# Altium PCB APSS_PCB_Project.PcbDoc
Units mm, origin at the board's own origin, x right, y up, seen from the top; angles counter-clockwise.
Board outline 72.03 x 37.43 mm, 2 copper layers (Top Layer, Bottom Layer); 30 components, 19 nets, 110 pads, 11 vias.
Unrouted connection lines stored in the file: 1.
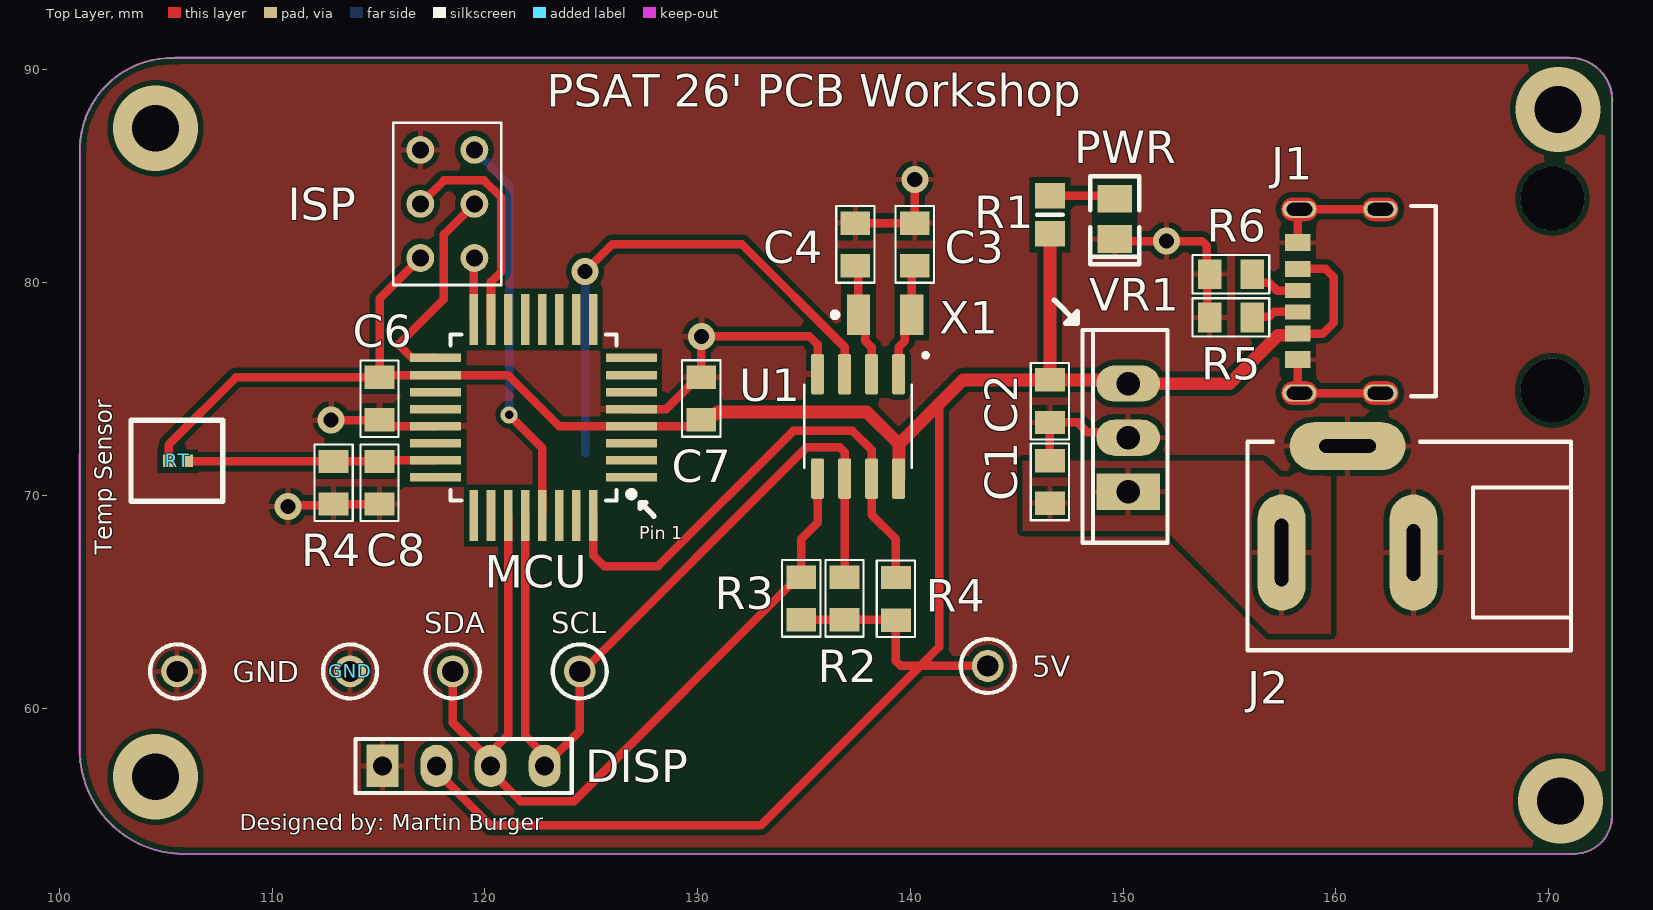
[diagram p0: Top Layer view]
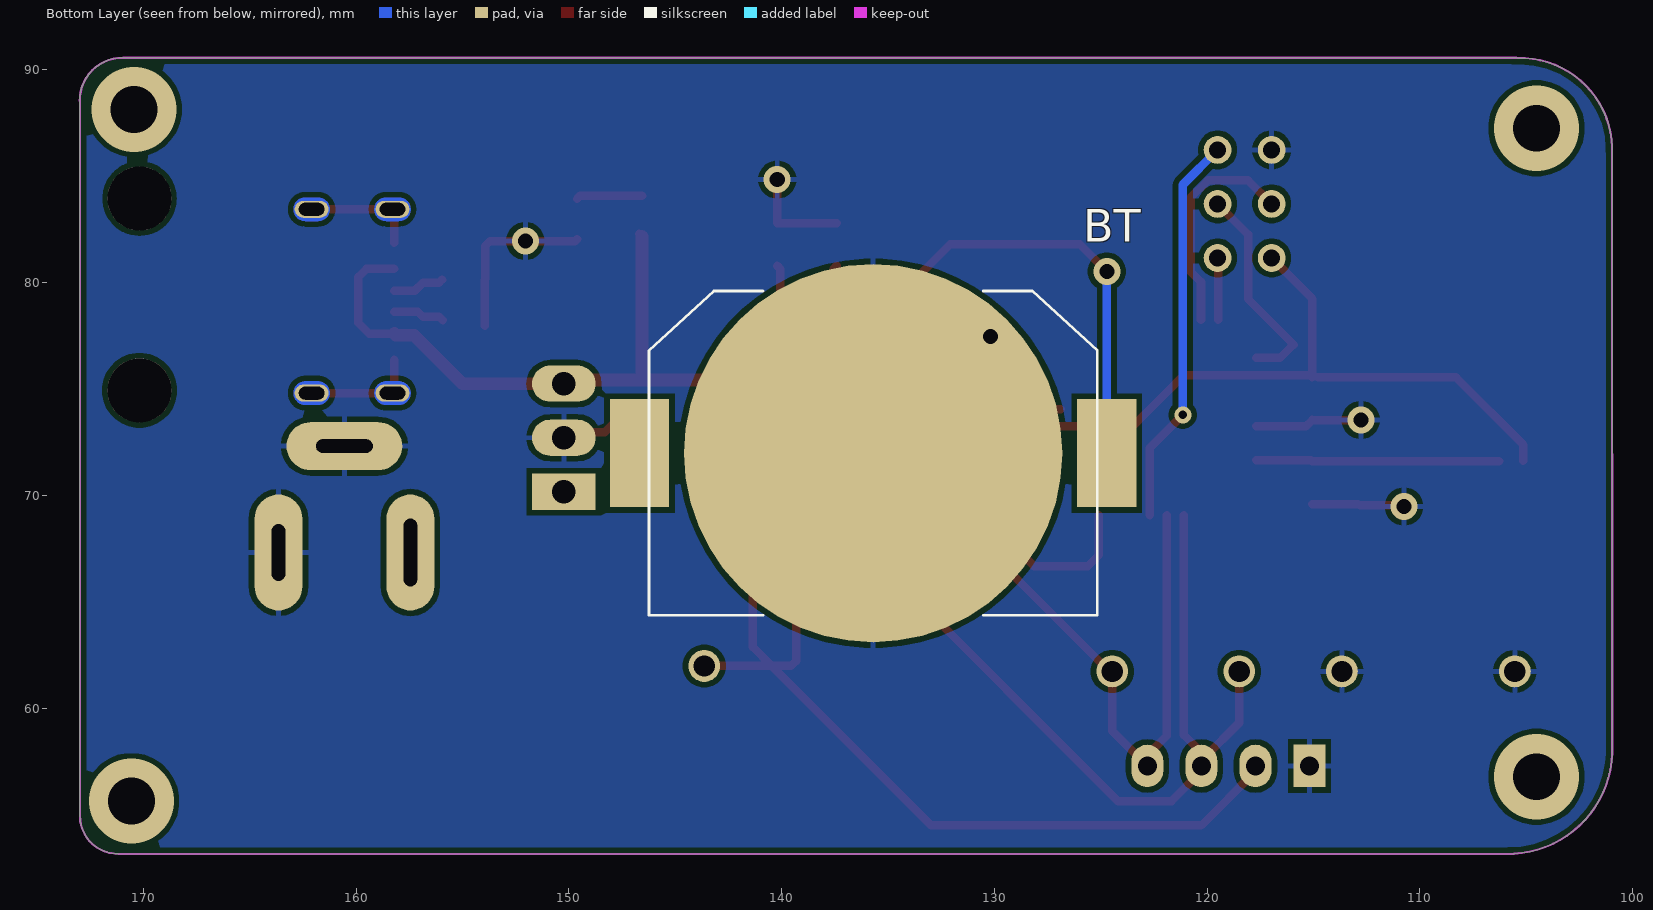
[diagram p1: Bottom Layer view, seen from below]

## Layer stack, top to bottom
Top Solder: solder mask 0.0102, Solder Resist, Dk 3.5
Top Layer: signal copper 0.0356
Dielectric 1: dielectric 0.32, FR-4, Dk 4.8
Bottom Layer: signal copper 0.0356
Bottom Solder: solder mask 0.0102, Solder Resist, Dk 3.5

## Board outline
100.965,86.105 100.965,86.107 cw(c105.29,86.233) 100.965,86.36 cw(c105.283,86.233) 105.41,90.551 105.452,90.562 170.955,90.562 170.951,90.562 cw(c170.989,88.563) 172.988,88.526 172.981,88.519 172.98,54.937 cw(c171.201,54.926) 171.17,53.147 105.624,53.136 105.579,53.152 cw(c105.851,58.038) 100.961,57.85

## Design rules (kind name [scope] priority, off if disabled: settings)
Clearance [All] p1: gap=0.254 ignorepadtopadclearanceinfootprint=FALSE
PolygonConnect [All] p1: connectstyle=Relief reliefconductorwidth=0.254 reliefentries=4 polygonreliefangle="90 Angle" airgapwidth=0.254
RoutingVias [All] p1: holewidth=0.711 width=1.27 viastyle="Through Hole" minholewidth=0.711 minwidth=1.27 maxholewidth=0.711 maxwidth=1.27
SolderMaskExpansion [All] p1: expansion=0.102 istentingtop=FALSE
Width [All] p1: maxlimit=1.2 minlimit=0.3 preferedwidth=0.4 minimp=50.000000 maximp=50.000000 favimp=50.000000
30 further rules are at their usual default settings.

## Classes and differential pairs
component class "555 Timer": 5V C1 C2 C6 C7 C8 DISP GND J1 MCU R1 R2 R3 R4 RT SCL SDA

## Components (designator, comment, footprint, x,y, rotation, side; value= is the part's Value field where it differs from the comment)
5V "5003" TP_TH 143.637,61.976 r0 top
BT "BK-912" BAT_BK-912 135.699,71.977 r180 bottom
C1 "330nF" "0805 CAP" 146.558,70.628 r90 top
C2 "100nF" "0805 CAP" 146.558,74.422 r270 top
C3 "*" "0805 CAP" 140.208,81.788 r90 top
C4 "*" "0805 CAP" 137.414,81.788 r90 top
C6 "100nF" "0805 CAP" 115.05,74.542 r270 top
C7 "100nF" "0805 CAP" 130.175,74.549 r90 top
C8 "100nF" "0805 CAP" 115.05,70.589 r270 top
DISP "Header 4" ece-HDR1X4 115.189,57.277 r0 top
GND "5003" TP_TH 105.537,61.722 r270 top
GND "5003" TP_TH 113.665,61.722 r270 top
J1 "USB4125-GF-A_REVA2" GCT_USB4125-GF-A_REVA2 161.29,79.121 r90 top
J2 "DC barrel jack" AC-Socket 163.449,67.31 r180 top value=socket (schematic designator J?)
MCU "ATmega328PB MCU" "32 - TQFP" 122.289,73.653 r180 top
PWR "*" ECE-LED2012-0805SM 149.606,82.992 r270 top (schematic designator LED1)
R1 "1k" RESC2012-0805SM 146.558,83.185 r90 top
R2 "*" "0805 RES" 136.906,65.151 r90 top
R3 "*" "0805 RES" 134.874,65.151 r90 top
R4 "*" "0805 RES" 139.319,65.135 r90 top
R4 "10k" "0805 RES" 112.891,70.589 r90 top
R5 "5.1k" "0805 RES" 155.067,78.359 r0 top
R6 "5.1k" "0805 RES" 155.067,80.391 r0 top
RT "NCP15XH103F03RC" THRMC1005X55N 105.576,71.621 r0 top
SCL "5003" TP_TH 124.46,61.722 r0 top
SDA "5003" TP_TH 118.491,61.722 r0 top
U1 "MCP7940N-I/SN" SOIC127P600X175-8N 137.541,73.237 r270 top
VR1 "" ece-TO220 152.087,68.766 r90 top
X1 "ABS07-32.768KHz-T" ABRA-ABS07-2_V 138.811,78.486 r0 top
? "AVR-ISP" AVR-ISP 118.237,83.693 r90 top

## Footprints (in the part's own frame and the unit in brackets; to place one, negate y for a bottom-side part, rotate by r counter-clockwise, add the part's x,y. Pads: shape width x height; smd on the part's side, far side on the other; paste and mask are expansions set on the pad)
"32 - TQFP" [mm]
  rect 2.4x0.4 smd: 1(-4.6,2.8) 2(-4.6,2) 3(-4.6,1.2) 4(-4.6,0.4) 5(-4.6,-0.4) 6(-4.6,-1.2) 7(-4.6,-2) 8(-4.6,-2.8) 17(4.6,-2.8) 18(4.6,-2) 19(4.6,-1.2) 20(4.6,-0.4) 21(4.6,0.4) 22(4.6,1.2) 23(4.6,2) 24(4.6,2.8)
  rect 0.4x2.4 smd: 9(-2.8,-4.6) 10(-2,-4.6) 11(-1.2,-4.6) 12(-0.4,-4.6) 13(0.4,-4.6) 14(1.2,-4.6) 15(2,-4.6) 16(2.8,-4.6) 25(2.8,4.6) 26(2,4.6) 27(1.2,4.6) 28(0.4,4.6) 29(-0.4,4.6) 30(-1.2,4.6) 31(-2,4.6) 32(-2.8,4.6)
  silkscreen extent -4.74,-3.9 3.9,3.9, body extent -4.5,-4.5 4.5,4.5, height 1.3
"0805 CAP" [mm] "http://www.digikey.co.nz/Web%20Export/Supplier%20Content/Vishay_8026/PDF/VishayBeyschlag_SolderPad.pdf?redirected=1 with dimension G modified by +0.25mm"
  rect 1.1x1.4 smd: 1(-1,0) 2(1,0)
  silkscreen extent -1.8,-0.9 1.8,0.9, body extent -1.04,-0.66 1.04,0.66, height 0.61
"0805 RES" [mm] "http://www.digikey.co.nz/Web%20Export/Supplier%20Content/Vishay_8026/PDF/VishayBeyschlag_SolderPad.pdf?redirected=1 with dimension G modified by +0.25mm"
  rect 1.1x1.4 smd: 1(-1,0) 2(1,0)
  silkscreen extent -1.8,-0.9 1.8,0.9, body extent -1.04,-0.66 1.04,0.66, height 0.61
ABRA-ABS07-2_V [mm] "SMD, 2-Leads, Body 3.2x1.5mm"
  rect 1.1x1.9 smd: 1(-1.25,0) 2(1.25,0)
  silkscreen extent -2.47,-0.12 -2.22,0.12, body extent -1.6,-0.75 1.6,0.75, height 0.9
AC-Socket [mm]
  oval 2.25x5.45 hole 0.635 slot 3.175 at 90 deg: 1(6,0)
  oval 5.45x2.25 hole 0.635 slot 2.667 at 0 deg: 2(2.9,-5)
  oval 2.25x5.45 hole 0.635 slot 2.667 at 90 deg: 3(-0.2,0)
  silkscreen extent -7.6,-5.2 7.6,4.6, body extent -6.7,-5 6,4.2, height 10.5
AVR-ISP [mm]
  round 1.308 hole 0.8: GND(2.54,1.27) MISO(-2.54,-1.27) MOSI(0,1.27) RST(2.54,-1.27) SCK(0,-1.27) VCC(-2.54,1.27)
  silkscreen extent -3.81,-2.54 3.81,2.54
BAT_BK-912 [mm]
  round 17.78 smd paste-10: 1(0,0)
  rect 2.79x5.08 smd: S1(-10.985,0) S2(10.985,0)
  silkscreen extent -10.54,-7.62 10.54,7.62
ece-HDR1X4 [mm] "Header 4 way"
  rect 1.5x2 hole 0.9: 1(0,0)
  oval 1.5x2 hole 0.9: 2(2.54,0) 3(5.08,0) 4(7.62,0)
  silkscreen extent -1.27,-1.27 8.89,1.27
ECE-LED2012-0805SM [mm] "SMD LED, Body; 2mm x 1.25 mm (LxW)"
  rect 1.3x1.6 smd: 1(-0.95,0) 2(0.95,0)
  silkscreen extent -2,-1.15 2.13,1.15
ece-TO220 [mm]
  rect 1.7x3 hole 1.1: 1(1.4,1.85)
  oval 1.7x3 hole 1.1: 2(3.94,1.85) 3(6.48,1.85)
  silkscreen extent -1,0 9,4
GCT_USB4125-GF-A_REVA2 [mm]
  rect 0.7x1.2 smd: A5(-0.5,3.08) B5(0.5,3.08)
  rect 0.76x1.2 smd: A9(1.52,3.08) B9(-1.52,3.08)
  rect 0.8x1.2 smd: A12(2.75,3.08) B12(-2.75,3.08)
  oval 0.8x1.6 hole 0.6 slot 1.2 at 90 deg mask+0: S1(-4.32,3) S2(4.32,3) S3(-4.32,-0.8) S4(4.32,-0.8)
  Top Layer region: -4.291,0.049 -4.263,0.047 -4.234,0.043 -4.206,0.038 -4.178,0.031 -4.15,0.023 -4.123,0.013 -4.096,0.002 -4.07,-0.01 -4.045,-0.024 -4.02,-0.039 -3.997,-0.055 -3.974,-0.073 -3.952,-0.091 -3.931,-0.111 -3.911,-0.132 -3.893,-0.154 -3.875,-0.177 -3.859,-0.2 -3.844,-0.225 -3.83,-0.25 -3.818,-0.276 -3.807,-0.303 -3.797,-0.33 -3.789,-0.358 -3.782,-0.386 -3.777,-0.414 -3.773,-0.443 -3.771,-0.471 -3.77,-0.5 -3.77,-1.1 -3.771,-1.129 -3.773,-1.157 -3.777,-1.186 -3.782,-1.214 -3.789,-1.242 -3.797,-1.27 -3.807,-1.297 -3.818,-1.324 -3.83,-1.35 -3.844,-1.375 -3.859,-1.4 -3.875,-1.423 -3.893,-1.446 -3.911,-1.468 -3.931,-1.489 -3.952,-1.509 -3.974,-1.527 -3.997,-1.545 -4.02,-1.561 -4.045,-1.576 -4.07,-1.59 -4.096,-1.602 -4.123,-1.613 -4.15,-1.623 -4.178,-1.631 -4.206,-1.638 -4.234,-1.643 -4.263,-1.647 -4.291,-1.649 -4.32,-1.65 -4.349,-1.649 -4.377,-1.647 -4.406,-1.643 -4.434,-1.638 -4.462,-1.631 -4.49,-1.623 -4.517,-1.613 -4.544,-1.602 -4.57,-1.59 -4.595,-1.576 -4.62,-1.561 -4.643,-1.545 -4.666,-1.527 -4.688,-1.509 -4.709,-1.489 -4.729,-1.468 -4.747,-1.446 -4.765,-1.423 -4.781,-1.4 -4.796,-1.375 -4.81,-1.35 -4.822,-1.324 -4.833,-1.297 -4.843,-1.27 -4.851,-1.242 -4.858,-1.214 -4.863,-1.186 -4.867,-1.157 -4.869,-1.129 -4.87,-1.1 -4.87,-0.5 -4.869,-0.471 -4.867,-0.443 -4.863,-0.414 -4.858,-0.386 -4.851,-0.358 -4.843,-0.33 -4.833,-0.303 -4.822,-0.276 -4.81,-0.25 -4.796,-0.225 -4.781,-0.2 -4.765,-0.177 -4.747,-0.154 -4.729,-0.132 -4.709,-0.111 -4.688,-0.091 -4.666,-0.073 -4.643,-0.055 -4.62,-0.039 -4.595,-0.024 -4.57,-0.01 -4.544,0.002 -4.517,0.013 -4.49,0.023 -4.462,0.031 -4.434,0.038 -4.406,0.043 -4.377,0.047 -4.349,0.049 -4.32,0.05
  Top Layer region: 4.349,0.049 4.377,0.047 4.406,0.043 4.434,0.038 4.462,0.031 4.49,0.023 4.517,0.013 4.544,0.002 4.57,-0.01 4.595,-0.024 4.62,-0.039 4.643,-0.055 4.666,-0.073 4.688,-0.091 4.709,-0.111 4.729,-0.132 4.747,-0.154 4.765,-0.177 4.781,-0.2 4.796,-0.225 4.81,-0.25 4.822,-0.276 4.833,-0.303 4.843,-0.33 4.851,-0.358 4.858,-0.386 4.863,-0.414 4.867,-0.443 4.869,-0.471 4.87,-0.5 4.87,-1.1 4.869,-1.129 4.867,-1.157 4.863,-1.186 4.858,-1.214 4.851,-1.242 4.843,-1.27 4.833,-1.297 4.822,-1.324 4.81,-1.35 4.796,-1.375 4.781,-1.4 4.765,-1.423 4.747,-1.446 4.729,-1.468 4.709,-1.489 4.688,-1.509 4.666,-1.527 4.643,-1.545 4.62,-1.561 4.595,-1.576 4.57,-1.59 4.544,-1.602 4.517,-1.613 4.49,-1.623 4.462,-1.631 4.434,-1.638 4.406,-1.643 4.377,-1.647 4.349,-1.649 4.32,-1.65 4.291,-1.649 4.263,-1.647 4.234,-1.643 4.206,-1.638 4.178,-1.631 4.15,-1.623 4.123,-1.613 4.096,-1.602 4.07,-1.59 4.045,-1.576 4.02,-1.561 3.997,-1.545 3.974,-1.527 3.952,-1.509 3.931,-1.489 3.911,-1.468 3.893,-1.446 3.875,-1.423 3.859,-1.4 3.844,-1.375 3.83,-1.35 3.818,-1.324 3.807,-1.297 3.797,-1.27 3.789,-1.242 3.782,-1.214 3.777,-1.186 3.773,-1.157 3.771,-1.129 3.77,-1.1 3.77,-0.5 3.771,-0.471 3.773,-0.443 3.777,-0.414 3.782,-0.386 3.789,-0.358 3.797,-0.33 3.807,-0.303 3.818,-0.276 3.83,-0.25 3.844,-0.225 3.859,-0.2 3.875,-0.177 3.893,-0.154 3.911,-0.132 3.931,-0.111 3.952,-0.091 3.974,-0.073 3.997,-0.055 4.02,-0.039 4.045,-0.024 4.07,-0.01 4.096,0.002 4.123,0.013 4.15,0.023 4.178,0.031 4.206,0.038 4.234,0.043 4.263,0.047 4.291,0.049 4.32,0.05
  Top Layer region: -4.291,3.849 -4.263,3.847 -4.234,3.843 -4.206,3.838 -4.178,3.831 -4.15,3.823 -4.123,3.813 -4.096,3.802 -4.07,3.79 -4.045,3.776 -4.02,3.761 -3.997,3.745 -3.974,3.727 -3.952,3.709 -3.931,3.689 -3.911,3.668 -3.893,3.646 -3.875,3.623 -3.859,3.6 -3.844,3.575 -3.83,3.55 -3.818,3.524 -3.807,3.497 -3.797,3.47 -3.789,3.442 -3.782,3.414 -3.777,3.386 -3.773,3.357 -3.771,3.329 -3.77,3.3 -3.77,2.7 -3.771,2.671 -3.773,2.643 -3.777,2.614 -3.782,2.586 -3.789,2.558 -3.797,2.53 -3.807,2.503 -3.818,2.476 -3.83,2.45 -3.844,2.425 -3.859,2.4 -3.875,2.377 -3.893,2.354 -3.911,2.332 -3.931,2.311 -3.952,2.291 -3.974,2.273 -3.997,2.255 -4.02,2.239 -4.045,2.224 -4.07,2.21 -4.096,2.198 -4.123,2.187 -4.15,2.177 -4.178,2.169 -4.206,2.162 -4.234,2.157 -4.263,2.153 -4.291,2.151 -4.32,2.15 -4.349,2.151 -4.377,2.153 -4.406,2.157 -4.434,2.162 -4.462,2.169 -4.49,2.177 -4.517,2.187 -4.544,2.198 -4.57,2.21 -4.595,2.224 -4.62,2.239 -4.643,2.255 -4.666,2.273 -4.688,2.291 -4.709,2.311 -4.729,2.332 -4.747,2.354 -4.765,2.377 -4.781,2.4 -4.796,2.425 -4.81,2.45 -4.822,2.476 -4.833,2.503 -4.843,2.53 -4.851,2.558 -4.858,2.586 -4.863,2.614 -4.867,2.643 -4.869,2.671 -4.87,2.7 -4.87,3.3 -4.869,3.329 -4.867,3.357 -4.863,3.386 -4.858,3.414 -4.851,3.442 -4.843,3.47 -4.833,3.497 -4.822,3.524 -4.81,3.55 -4.796,3.575 -4.781,3.6 -4.765,3.623 -4.747,3.646 -4.729,3.668 -4.709,3.689 -4.688,3.709 -4.666,3.727 -4.643,3.745 -4.62,3.761 -4.595,3.776 -4.57,3.79 -4.544,3.802 -4.517,3.813 -4.49,3.823 -4.462,3.831 -4.434,3.838 -4.406,3.843 -4.377,3.847 -4.349,3.849 -4.32,3.85
  Top Layer region: 4.349,3.849 4.377,3.847 4.406,3.843 4.434,3.838 4.462,3.831 4.49,3.823 4.517,3.813 4.544,3.802 4.57,3.79 4.595,3.776 4.62,3.761 4.643,3.745 4.666,3.727 4.688,3.709 4.709,3.689 4.729,3.668 4.747,3.646 4.765,3.623 4.781,3.6 4.796,3.575 4.81,3.55 4.822,3.524 4.833,3.497 4.843,3.47 4.851,3.442 4.858,3.414 4.863,3.386 4.867,3.357 4.869,3.329 4.87,3.3 4.87,2.7 4.869,2.671 4.867,2.643 4.863,2.614 4.858,2.586 4.851,2.558 4.843,2.53 4.833,2.503 4.822,2.476 4.81,2.45 4.796,2.425 4.781,2.4 4.765,2.377 4.747,2.354 4.729,2.332 4.709,2.311 4.688,2.291 4.666,2.273 4.643,2.255 4.62,2.239 4.595,2.224 4.57,2.21 4.544,2.198 4.517,2.187 4.49,2.177 4.462,2.169 4.434,2.162 4.406,2.157 4.377,2.153 4.349,2.151 4.32,2.15 4.291,2.151 4.263,2.153 4.234,2.157 4.206,2.162 4.178,2.169 4.15,2.177 4.123,2.187 4.096,2.198 4.07,2.21 4.045,2.224 4.02,2.239 3.997,2.255 3.974,2.273 3.952,2.291 3.931,2.311 3.911,2.332 3.893,2.354 3.875,2.377 3.859,2.4 3.844,2.425 3.83,2.45 3.818,2.476 3.807,2.503 3.797,2.53 3.789,2.558 3.782,2.586 3.777,2.614 3.773,2.643 3.771,2.671 3.77,2.7 3.77,3.3 3.771,3.329 3.773,3.357 3.777,3.386 3.782,3.414 3.789,3.442 3.797,3.47 3.807,3.497 3.818,3.524 3.83,3.55 3.844,3.575 3.859,3.6 3.875,3.623 3.893,3.646 3.911,3.668 3.931,3.689 3.952,3.709 3.974,3.727 3.997,3.745 4.02,3.761 4.045,3.776 4.07,3.79 4.096,3.802 4.123,3.813 4.15,3.823 4.178,3.831 4.206,3.838 4.234,3.843 4.263,3.847 4.291,3.849 4.32,3.85
  Bottom Layer region: -4.291,0.049 -4.263,0.047 -4.234,0.043 -4.206,0.038 -4.178,0.031 -4.15,0.023 -4.123,0.013 -4.096,0.002 -4.07,-0.01 -4.045,-0.024 -4.02,-0.039 -3.997,-0.055 -3.974,-0.073 -3.952,-0.091 -3.931,-0.111 -3.911,-0.132 -3.893,-0.154 -3.875,-0.177 -3.859,-0.2 -3.844,-0.225 -3.83,-0.25 -3.818,-0.276 -3.807,-0.303 -3.797,-0.33 -3.789,-0.358 -3.782,-0.386 -3.777,-0.414 -3.773,-0.443 -3.771,-0.471 -3.77,-0.5 -3.77,-1.1 -3.771,-1.129 -3.773,-1.157 -3.777,-1.186 -3.782,-1.214 -3.789,-1.242 -3.797,-1.27 -3.807,-1.297 -3.818,-1.324 -3.83,-1.35 -3.844,-1.375 -3.859,-1.4 -3.875,-1.423 -3.893,-1.446 -3.911,-1.468 -3.931,-1.489 -3.952,-1.509 -3.974,-1.527 -3.997,-1.545 -4.02,-1.561 -4.045,-1.576 -4.07,-1.59 -4.096,-1.602 -4.123,-1.613 -4.15,-1.623 -4.178,-1.631 -4.206,-1.638 -4.234,-1.643 -4.263,-1.647 -4.291,-1.649 -4.32,-1.65 -4.349,-1.649 -4.377,-1.647 -4.406,-1.643 -4.434,-1.638 -4.462,-1.631 -4.49,-1.623 -4.517,-1.613 -4.544,-1.602 -4.57,-1.59 -4.595,-1.576 -4.62,-1.561 -4.643,-1.545 -4.666,-1.527 -4.688,-1.509 -4.709,-1.489 -4.729,-1.468 -4.747,-1.446 -4.765,-1.423 -4.781,-1.4 -4.796,-1.375 -4.81,-1.35 -4.822,-1.324 -4.833,-1.297 -4.843,-1.27 -4.851,-1.242 -4.858,-1.214 -4.863,-1.186 -4.867,-1.157 -4.869,-1.129 -4.87,-1.1 -4.87,-0.5 -4.869,-0.471 -4.867,-0.443 -4.863,-0.414 -4.858,-0.386 -4.851,-0.358 -4.843,-0.33 -4.833,-0.303 -4.822,-0.276 -4.81,-0.25 -4.796,-0.225 -4.781,-0.2 -4.765,-0.177 -4.747,-0.154 -4.729,-0.132 -4.709,-0.111 -4.688,-0.091 -4.666,-0.073 -4.643,-0.055 -4.62,-0.039 -4.595,-0.024 -4.57,-0.01 -4.544,0.002 -4.517,0.013 -4.49,0.023 -4.462,0.031 -4.434,0.038 -4.406,0.043 -4.377,0.047 -4.349,0.049 -4.32,0.05
  Bottom Layer region: 4.349,0.049 4.377,0.047 4.406,0.043 4.434,0.038 4.462,0.031 4.49,0.023 4.517,0.013 4.544,0.002 4.57,-0.01 4.595,-0.024 4.62,-0.039 4.643,-0.055 4.666,-0.073 4.688,-0.091 4.709,-0.111 4.729,-0.132 4.747,-0.154 4.765,-0.177 4.781,-0.2 4.796,-0.225 4.81,-0.25 4.822,-0.276 4.833,-0.303 4.843,-0.33 4.851,-0.358 4.858,-0.386 4.863,-0.414 4.867,-0.443 4.869,-0.471 4.87,-0.5 4.87,-1.1 4.869,-1.129 4.867,-1.157 4.863,-1.186 4.858,-1.214 4.851,-1.242 4.843,-1.27 4.833,-1.297 4.822,-1.324 4.81,-1.35 4.796,-1.375 4.781,-1.4 4.765,-1.423 4.747,-1.446 4.729,-1.468 4.709,-1.489 4.688,-1.509 4.666,-1.527 4.643,-1.545 4.62,-1.561 4.595,-1.576 4.57,-1.59 4.544,-1.602 4.517,-1.613 4.49,-1.623 4.462,-1.631 4.434,-1.638 4.406,-1.643 4.377,-1.647 4.349,-1.649 4.32,-1.65 4.291,-1.649 4.263,-1.647 4.234,-1.643 4.206,-1.638 4.178,-1.631 4.15,-1.623 4.123,-1.613 4.096,-1.602 4.07,-1.59 4.045,-1.576 4.02,-1.561 3.997,-1.545 3.974,-1.527 3.952,-1.509 3.931,-1.489 3.911,-1.468 3.893,-1.446 3.875,-1.423 3.859,-1.4 3.844,-1.375 3.83,-1.35 3.818,-1.324 3.807,-1.297 3.797,-1.27 3.789,-1.242 3.782,-1.214 3.777,-1.186 3.773,-1.157 3.771,-1.129 3.77,-1.1 3.77,-0.5 3.771,-0.471 3.773,-0.443 3.777,-0.414 3.782,-0.386 3.789,-0.358 3.797,-0.33 3.807,-0.303 3.818,-0.276 3.83,-0.25 3.844,-0.225 3.859,-0.2 3.875,-0.177 3.893,-0.154 3.911,-0.132 3.931,-0.111 3.952,-0.091 3.974,-0.073 3.997,-0.055 4.02,-0.039 4.045,-0.024 4.07,-0.01 4.096,0.002 4.123,0.013 4.15,0.023 4.178,0.031 4.206,0.038 4.234,0.043 4.263,0.047 4.291,0.049 4.32,0.05
  Bottom Layer region: -4.291,3.849 -4.263,3.847 -4.234,3.843 -4.206,3.838 -4.178,3.831 -4.15,3.823 -4.123,3.813 -4.096,3.802 -4.07,3.79 -4.045,3.776 -4.02,3.761 -3.997,3.745 -3.974,3.727 -3.952,3.709 -3.931,3.689 -3.911,3.668 -3.893,3.646 -3.875,3.623 -3.859,3.6 -3.844,3.575 -3.83,3.55 -3.818,3.524 -3.807,3.497 -3.797,3.47 -3.789,3.442 -3.782,3.414 -3.777,3.386 -3.773,3.357 -3.771,3.329 -3.77,3.3 -3.77,2.7 -3.771,2.671 -3.773,2.643 -3.777,2.614 -3.782,2.586 -3.789,2.558 -3.797,2.53 -3.807,2.503 -3.818,2.476 -3.83,2.45 -3.844,2.425 -3.859,2.4 -3.875,2.377 -3.893,2.354 -3.911,2.332 -3.931,2.311 -3.952,2.291 -3.974,2.273 -3.997,2.255 -4.02,2.239 -4.045,2.224 -4.07,2.21 -4.096,2.198 -4.123,2.187 -4.15,2.177 -4.178,2.169 -4.206,2.162 -4.234,2.157 -4.263,2.153 -4.291,2.151 -4.32,2.15 -4.349,2.151 -4.377,2.153 -4.406,2.157 -4.434,2.162 -4.462,2.169 -4.49,2.177 -4.517,2.187 -4.544,2.198 -4.57,2.21 -4.595,2.224 -4.62,2.239 -4.643,2.255 -4.666,2.273 -4.688,2.291 -4.709,2.311 -4.729,2.332 -4.747,2.354 -4.765,2.377 -4.781,2.4 -4.796,2.425 -4.81,2.45 -4.822,2.476 -4.833,2.503 -4.843,2.53 -4.851,2.558 -4.858,2.586 -4.863,2.614 -4.867,2.643 -4.869,2.671 -4.87,2.7 -4.87,3.3 -4.869,3.329 -4.867,3.357 -4.863,3.386 -4.858,3.414 -4.851,3.442 -4.843,3.47 -4.833,3.497 -4.822,3.524 -4.81,3.55 -4.796,3.575 -4.781,3.6 -4.765,3.623 -4.747,3.646 -4.729,3.668 -4.709,3.689 -4.688,3.709 -4.666,3.727 -4.643,3.745 -4.62,3.761 -4.595,3.776 -4.57,3.79 -4.544,3.802 -4.517,3.813 -4.49,3.823 -4.462,3.831 -4.434,3.838 -4.406,3.843 -4.377,3.847 -4.349,3.849 -4.32,3.85
  Bottom Layer region: 4.349,3.849 4.377,3.847 4.406,3.843 4.434,3.838 4.462,3.831 4.49,3.823 4.517,3.813 4.544,3.802 4.57,3.79 4.595,3.776 4.62,3.761 4.643,3.745 4.666,3.727 4.688,3.709 4.709,3.689 4.729,3.668 4.747,3.646 4.765,3.623 4.781,3.6 4.796,3.575 4.81,3.55 4.822,3.524 4.833,3.497 4.843,3.47 4.851,3.442 4.858,3.414 4.863,3.386 4.867,3.357 4.869,3.329 4.87,3.3 4.87,2.7 4.869,2.671 4.867,2.643 4.863,2.614 4.858,2.586 4.851,2.558 4.843,2.53 4.833,2.503 4.822,2.476 4.81,2.45 4.796,2.425 4.781,2.4 4.765,2.377 4.747,2.354 4.729,2.332 4.709,2.311 4.688,2.291 4.666,2.273 4.643,2.255 4.62,2.239 4.595,2.224 4.57,2.21 4.544,2.198 4.517,2.187 4.49,2.177 4.462,2.169 4.434,2.162 4.406,2.157 4.377,2.153 4.349,2.151 4.32,2.15 4.291,2.151 4.263,2.153 4.234,2.157 4.206,2.162 4.178,2.169 4.15,2.177 4.123,2.187 4.096,2.198 4.07,2.21 4.045,2.224 4.02,2.239 3.997,2.255 3.974,2.273 3.952,2.291 3.931,2.311 3.911,2.332 3.893,2.354 3.875,2.377 3.859,2.4 3.844,2.425 3.83,2.45 3.818,2.476 3.807,2.503 3.797,2.53 3.789,2.558 3.782,2.586 3.777,2.614 3.773,2.643 3.771,2.671 3.77,2.7 3.77,3.3 3.771,3.329 3.773,3.357 3.777,3.386 3.782,3.414 3.789,3.442 3.797,3.47 3.807,3.497 3.818,3.524 3.83,3.55 3.844,3.575 3.859,3.6 3.875,3.623 3.893,3.646 3.911,3.668 3.931,3.689 3.952,3.709 3.974,3.727 3.997,3.745 4.02,3.761 4.045,3.776 4.07,3.79 4.096,3.802 4.123,3.813 4.15,3.823 4.178,3.831 4.206,3.838 4.234,3.843 4.263,3.847 4.291,3.849 4.32,3.85
  silkscreen extent -4.47,-3.4 4.47,-2.25
RESC2012-0805SM [mm] "Chip Resistor, Body 2.0x1.3mm, IPC Medium Density"
  rect 1.2x1.4 smd: 1(-0.9,0) 2(0.9,0)
  silkscreen extent 0,-0.6 0,0.6, body extent -1,-0.62 1,0.63, height 0.5
SOIC127P600X175-8N [mm]
  rrect25% 1.9x0.6 smd: 1(-2.455,1.905) 2(-2.455,0.635) 3(-2.455,-0.635) 4(-2.455,-1.905) 5(2.455,-1.905) 6(2.455,-0.635) 7(2.455,0.635) 8(2.455,1.905)
  silkscreen extent -3.44,-2.52 1.95,3.27, body extent -3,-2.45 3,2.45, height 1.75
THRMC1005X55N [mm]
  rect 0.54x0.6 smd: 1(-0.432,0) 2(0.432,0)
  body extent -0.5,-0.25 0.5,0.25, height 0.55
TP_TH [mm] "Test Point, Through Hole, Dia 2.54mm"
  round 1.5 hole 1: 1(0,0)
  silkscreen extent -1.27,-1.27 1.27,1.27, body extent -1.27,-1.27 1.27,1.27, height 4.57

## Part data
5V GND GND SCL SDA: library part TestPoint, "Test Point, Orange, 1-Pin THD, RoHS", Forward Current="3 A", Forward Voltage="1.08 V", Max Operating Temperature="150 degC", Max Surge Current="80 A", Min Operating Temperature="-65 degC", Package Quantity=500, Peak Reverse Current="600 uA", ComponentLink1Description="Manufacturer URL", ComponentLink1URL=http://www.keyelco.com/, ComponentLink2Description=Datasheet, ComponentLink2URL=http://keyelco.com/userAssets/file/M65p56.pdf, DatasheetVersion=Jun-15, Diameter="5.3 mm", Height="0.25 inch", Length="9.5 mm", Mount="Through Hole", PackageDescription="1-Pin Through Hole Device, Dia 2.54 mm", PackageReference=5003, Packaging=Bulk, Pins=2, Radiation Hardening=No, REACH SVHC="No SVHC", RoHSCompliant=true, Weight="0.01 lb", Width="0.25 inch"
BT: "BATTERY RETAINER COIN 20MM SMD", Package=None, Availability=Unavailable, MF=MPD, MP=BK-912, Price=None, SnapEDA_Link=https://www.snapeda.com/parts/BK-912/Memory%20Protection%20Devices/view-part/4219672/?ref=snap
C1 C2 C3 C4 C6 C7 C8: library part CerCap_SMT_0805, "SMT ceramic capacitor 0805 size"
DISP: "Header, 4-Pin", LatestRevisionDate=17-Jul-2002, LatestRevisionNote="Re-released for DXP Platform.", Publisher="Altium Limited"
J1: Package=None, Availability=Unavailable, MP=USB4125-GF-A_REVA2, Price=None
J2: library part DC_Input, "DC barrel jack connection to AC source"
MCU: library part ATmega328PB_SMT_TQFP32, "IC MCU 8BIT 32KB FLASH 32TQFP", Manufacturer=Atmel, Manufacturer Part Number=ATMEGA328PB-AN, Operating Temperature="-40°C ~ 105°C (TA)", Package / Case=32-TQFP, Supplier Device Package="32-TQFP (7x7)", Voltage - Supply (Vcc/Vdd)="1.8 V ~ 5.5 V", Category="Integrated Circuits (ICs)", ComponentLink1Description=http://www.atmel.com/images/atmel-42397-8-bit-avr-microcontroller-atmega328pb_datasheet.pdf, ComponentLink1URL=http://www.atmel.com/images/atmel-42397-8-bit-avr-microcontroller-atmega328pb_datasheet.pdf, Connectivity="I²C, SPI, UART/USART", Core Processor=AVR, Core Size=8-Bit, Data Converters="A/D 8x10b", EEPROM Size="1K x 8", Number of I/O=27, Oscillator Type=Internal, Packaging=Tray, Part Status=Active, Peripherals="Brown-out Detect/Reset, POR, PWM, WDT", Pricing 1="1=2.74, 10=2.448, 25=2.2032, 100=2.0074, 250=1.81152, 500=1.62548, 1000=1.37088 (USD)", Program Memory Size="32KB (16K x 16)", Program Memory Type=FLASH, RAM Size="2K x 8", RoHS="RoHS Compliant", Speed=20MHz, Stock 1=366, Supplier 1=Digi-Key
PWR: library part LED-SM0805, "SMT LED", Manufacturer="Generic Components", Class I=Optoelectronic, Class II=LED, Published=8-Jun-2000, Publisher="Altium Limited", Revision="July-2002: Re-released for DXP Platform."
R1: library part "Res SM 0805", "SM resistor"
R2 R3 R4 R4 R5 R6: library part Res_SMT_0805, "0805 resistor", ComponentLink1Description=https://nz.mouser.com/datasheet/2/315/AOA0000C304-1149620.pdf, LatestRevisionDate=17-Jul-2002, LatestRevisionNote="Re-released for DXP Platform.", PackageReference=AXIAL-0.4, Published=8-Jun-2000, Publisher="Altium Limited"
RT: library part CMP-041-000000-1, "NTC Thermistor 10k 0402 (1005 Metric)", Package="1005 Taiyo Yuden", Check_prices=https://www.snapeda.com/parts/NCP15XH103F03RC/Murata/view-part/?ref=eda, Design Item ID=NCP15XH103F03RC, MF=Murata, MP=NCP15XH103F03RC, SnapEDA_Link=https://www.snapeda.com/parts/NCP15XH103F03RC/Murata/view-part/?ref=snap, Source=NCP15XH103F03RC.SchLib
U1: "Microchip MCP7940N-I/SN, Real Time Clock, 64B RAM Serial-I2C, 8-Pin SOIC", Package="SO-8 Microchip", Check_prices=https://www.snapeda.com/parts/MCP7940N-I/SN/Microchip/view-part/?ref=eda, MF=Microchip, MP=MCP7940N-I/SN, SnapEDA_Link=https://www.snapeda.com/parts/MCP7940N-I/SN/Microchip/view-part/?ref=snap
VR1: library part VoltRegBig, "Voltage Regulator"
X1: library part CMP-003-00022-2, "Low Profile Crystal, 32.768 kHz, +/- 20 ppm, 12.5 pF, -40 to 85 degC, 2-Pin SMD, Pb-Free, Tape and Reel", Case/Package=CSMD, Frequency=32.768kHz, Frequency Tolerance=20ppm, Load Capacitance=12.5pF, Manufacturer=Abracon, Max Operating Temperature=85°C, Min Operating Temperature=-40°C, Package Description="2-Pin Surface Mount Device, Body 3.2 x 1.5 mm", Package Quantity=3000, Package Reference=ABS07-2, Datasheet URL=http://www.abracon.com/Resonators/ABS07.pdf, Datasheet Version=Aug-15, ESR=70k, Manufacturer URL=http://www.abracon.com/, Mounting Technology=SM, Package URL=http://www.abracon.com/Support/PackageDrawing/Resonators/ABS07.PDF, Packaging=TapeandReel, Pins=2, RoHS Compliant=True, Tolerance=20ppm
?: library part CMP-036-000000-1, "Emulators / Simulators AVR USB IN CIRCUIT EMUL/PRGMR ISP", Package=None, Availability=Unavailable, Component Type=Standard, Design Item ID=AVR-ISP, MF=Gravitech, MP=AVR-ISP, Pin Count=6, Price=None, SnapEDA_Link=https://www.snapeda.com/parts/AVR-ISP/Gravitech/view-part/4593377/?ref=snap, Source=SnapEDAsch.SchLib

## Free pads (board coordinates)
  round 3 hole 3 unplated: 25(170.18,83.947) 26(170.18,74.93)

## Via types
v1: diameter 1.27, hole 0.711, Top Layer to Bottom Layer, 6 vias
v2: diameter 4, hole 2.2, Top Layer to Bottom Layer, 4 vias
v3: diameter 0.8, hole 0.4, Top Layer to Bottom Layer, 1 vias

## Nets (pads, with @x,y where several pads share a name; then routed paths per layer and width w, separated by ;. In a path a pad name is that pad's centre, name@x,y a point inside that pad or via, vN(x,y) a via of type N, cw(c..) or ccw(c..) an arc to the next point about the centre after c; other vN are vias at no path point)
GND: ?.GND BT.1 C1.2 C2.2 C3.2 C4.2 C6.2 C7.2 C8.2 DISP.1 GND.1 J1.A12 J1.B12 J1.S1 J1.S2 J1.S3 J1.S4 J2.2 J2.3 MCU.5 MCU.21 PWR.2 R4.1@112.891,69.589 R5.1 R6.1 U1.4 VR1.2 | length 52.5
  Top Layer w0.4: v1(110.744,69.469) 110.804,69.529 112.831,69.529 112.891,69.589 C8.2 ; v1(112.776,73.533) 112.78,73.537 115.046,73.537 C6.2 115.339,73.253 MCU.21 ; MCU.5 128.529,74.053 129.675,75.199 130.025,75.549 C7.2 v1(130.175,77.47) 135.255,77.47 135.636,77.089 U1.4 ; C4.2 C3.2 v1(140.208,84.836) ; C1.2 C2.2 147.858,73.422 148.326,72.954 149.989,72.954 VR1.2 VR1.2@149.587,72.706 ; PWR.2 149.7,81.948 v1(152.046,81.948) 153.706,81.948 153.94,81.713 153.94,80.153 153.956,80.137 R5.1@153.956,77.978 ; J1.B12 158.21,74.881 J1.S1 J1.S3 ; J1.A12 158.21,83.361 J1.S2 J1.S4
MFP: MCU.32 R4.2@139.319,66.135 U1.7 | length 24.6
  Top Layer w0.4: MCU.32 125.089,67.189 125.603,66.675 128.143,66.675 134.493,73.025 137.287,73.025 138.176,72.136 138.176,69.088 139.319,67.945 R4.2@139.319,66.135
MISO: ?.MISO MCU.16 | length 2.9
  Top Layer w0.4: MCU.16 119.489,81.135 ?.MISO
MOSI: ?.MOSI MCU.15 | length 10.5
  Top Layer w0.4: ?.MOSI 118.075,84.801 119.966,84.801 120.777,83.99 120.777,80.518 120.289,80.03 MCU.15
NetC3_1: C3.1 U1.1 X1.2 | length 5.4
  Top Layer w0.4: U1.1 139.446,76.958 139.743,77.255 139.743,78.168 X1.2 140.061,80.641 C3.1
NetC4_1: C4.1 U1.2 X1.1 | length 5.4
  Top Layer w0.4: C4.1 137.561,80.641 X1.1 137.879,78.168 137.879,77.255 138.176,76.958 U1.2
NetJ1_A5: J1.A5 R5.2 | length 2.4
  Top Layer w0.4: R5.2@155.94,78.232 156.088,78.38 156.856,78.38 157.097,78.621 J1.A5
NetJ1_B5: J1.B5 R6.2 | length 2.5
  Top Layer w0.4: R6.2@155.956,80.137 156.11,79.983 156.872,79.983 157.244,79.611 158.2,79.611 J1.B5
NetPWR_1: PWR.1 R1.2 | length 3.1
  Top Layer w0.4: R1.2 149.463,84.085 PWR.1
RESET: ?.RST MCU.29 | length 18.5
  Top Layer w0.4: v3(121.146,73.78) 122.689,72.237 MCU.29
  Bottom Layer w0.4: ?.RST 121.146,84.594 v3(121.146,73.78)
RX: MCU.30
SCK: ?.SCK MCU.17 | length 10.1
  Top Layer w0.4: MCU.17 116.572,76.453 115.939,77.085 118.075,79.222 118.075,82.261 ?.SCK
SCL: DISP.4 MCU.28 R2.2 SCL.1 U1.6 | length 40.1
  Top Layer w0.4: MCU.28 121.889,58.705 122.809,57.785 DISP.4 124.46,58.928 SCL.1 124.587,61.722 135.128,72.263 136.672,72.263 136.906,72.029 U1.6 R2.2
SDA: DISP.3 MCU.27 R3.2 SDA.1 U1.5 | length 42.2
  Top Layer w0.4: SDA.1 118.491,59.305 DISP.3@120.078,57.717 ; DISP.3@119.888,57.277 119.888,57.527 DISP.3@120.078,57.717 ; MCU.27 121.089,58.728 DISP.3@120.078,57.717 ; U1.5 135.636,68.707 134.874,67.945 R3.2 134.724,66.151 124.199,55.626 121.67,55.626 120.269,57.027 DISP.3 120.269,57.527 DISP.3@120.078,57.717
TX: MCU.31
VBAT: BT.S1 BT.S2 U1.3 | length 24.5
  Top Layer w0.4: v1(124.714,80.518) 125.984,81.788 132.08,81.788 136.914,76.954 136.914,75.7 U1.3
  Bottom Layer w0.4: BT.S2 v1(124.714,80.518)
VCC: 5V.1 ?.VCC C2.1 C6.1 C7.1 DISP.2 J1.A9 J1.B9 MCU.4 MCU.18 R1.1 R2.1 R3.1 R4.1@139.319,64.135 RT.1 U1.8 VR1.3 | length 130.3
  Top Layer w0.4: RT.1 105.144,72.383 108.303,75.542 C6.1@114.796,75.542 ; C6.1 C6.1@115.05,75.653 ; ?.VCC 115.05,79.236 C6.1@115.05,75.653 ; DISP.2 117.729,57.027 120.273,54.483 132.969,54.483 140.462,61.976 ; MCU.4 123.489,73.253 121.089,75.653 MCU.18 116.689,75.653 C6.1@115.05,75.653 ; MCU.4@126.89,73.254 129.653,73.254 C7.1@129.655,73.256 ; R3.1 R2.1 136.914,64.143 139.311,64.143 139.319,64.135 139.319,62.21 139.553,61.976 140.462,61.976 ; U1.8 U1.8@139.46,70.796 ; 141.351,74.295 141.351,62.865 140.462,61.976 ; 5V.1@144.018,61.976 5V.1 140.462,61.976 ; R1.1@146.558,82.158 R1.1@146.685,82.285 ; J1.B9 159.389,77.601 159.893,78.105 159.893,80.264 159.516,80.641 J1.A9
  Top Layer w0.6: C7.1 130.425,73.799 130.811,73.799 130.926,73.914 137.95,73.914 139.46,72.404 ; U1.8@139.46,70.796 139.46,72.404 ; R1.1@146.558,82.158 C2.1 ; J1.B9 158.13,77.521 157.277,77.521 155.002,75.246 VR1.3 150.061,75.422 C2.1 ; 139.46,72.404 141.351,74.295 142.478,75.422 C2.1
VIN: C1.1 J2.1 VR1.1 | length 0.8
  Top Layer w0.4: VR1.1@149.699,69.628 VR1.1
Vtemp: C8.1 MCU.23 R4.2@112.891,71.589 RT.2 | length 11.4
  Top Layer w0.4: 106.281,71.589 112.891,71.589 C8.1 115.114,71.653 MCU.23
pads on no net: MCU.1 MCU.2 MCU.3 MCU.6 MCU.7 MCU.8 MCU.9 MCU.10 MCU.11 MCU.12 MCU.13 MCU.14 MCU.19 MCU.20 MCU.22 MCU.24 MCU.25 MCU.26
copper on no net:
  other v2: 170.561,55.626 104.521,56.769 104.521,87.249 170.434,88.138

## Polygon pours and split planes (outlines as drawn)
VIN on Top Layer "VIN_L01_P015" (solid, pour order 15): 145.288,68.326 152.019,68.326 156.845,63.5 159.766,63.5 159.766,70.358 159.766,70.866 157.353,70.866 156.591,71.628 145.288,71.628
GND on Top Layer "NONET_L-01_P-001" (solid, remove dead copper, pour order 17): 100.965,90.551 100.965,53.152 172.98,53.152 172.98,90.551
VIN on Top Layer "NONET_L-01_P-001" (solid, pour order 18): 164.338,78.486 164.338,62.484 148.082,62.484 148.082,71.628 154.94,71.628 155.321,72.009 155.321,78.486
GND on Bottom Layer "NONET_L-01_P-001" (solid, remove dead copper, pour order 16): 100.939,90.551 101.168,53.152 172.98,53.152 172.98,90.551

## Keep-outs
Keep-Out Layer:
  lines w0.1: 100.965,86.36 cw(c105.283,86.233) 105.41,90.551 105.452,90.562 170.955,90.562 170.951,90.562 cw(c170.989,88.563) 172.988,88.526 172.981,88.519 172.98,54.937 cw(c171.201,54.926) 171.17,53.147 105.624,53.136 105.579,53.152 cw(c105.851,58.038) 100.961,57.85 100.965,86.105 100.965,86.107 cw(c105.29,86.233) 100.965,86.36 ; 100.965,86.36 100.965,86.36

## Silkscreen, mask and mechanical layers (free items; w line width, h text height)
Top Overlay:
  lines w0.254: 127.559,69.652 127.305,69.652 ; 127.94,69.017 127.305,69.652 ; 146.766,79.167 147.843,78.09 ; 127.305,69.652 127.305,69.398 127.305,69.652 ; 147.843,78.09 147.305,78.09 147.843,78.628 147.843,78.09 ; 103.366,69.716 107.684,69.716 107.684,73.526 103.366,73.526 103.366,69.716
  text "PSAT 26' PCB Workshop" at 122.908,88.265 h1.52
  text "ISP" at 110.744,82.931 h1.52
  text "Pin 1" at 127.247,67.938 h0.6
  text "Temp Sensor" at 102.453,67.206 h0.8 r90
  text "Designed by: Martin Burger" at 108.481,54.252 h0.76
Mechanical 1:
  the board outline again, w0.1